# Altium PCB Rigid-QFN-1.PcbDoc (part 2 of 2)
Units mil, origin at the board's own origin, x right, y up, seen from the top; angles counter-clockwise.
Board outline 1000.01 x 1200 mil, 2 copper layers (Top Layer, Bottom Layer), stack 0.552 mil thick; 55 components, 23 nets, 162 pads, 82 vias.
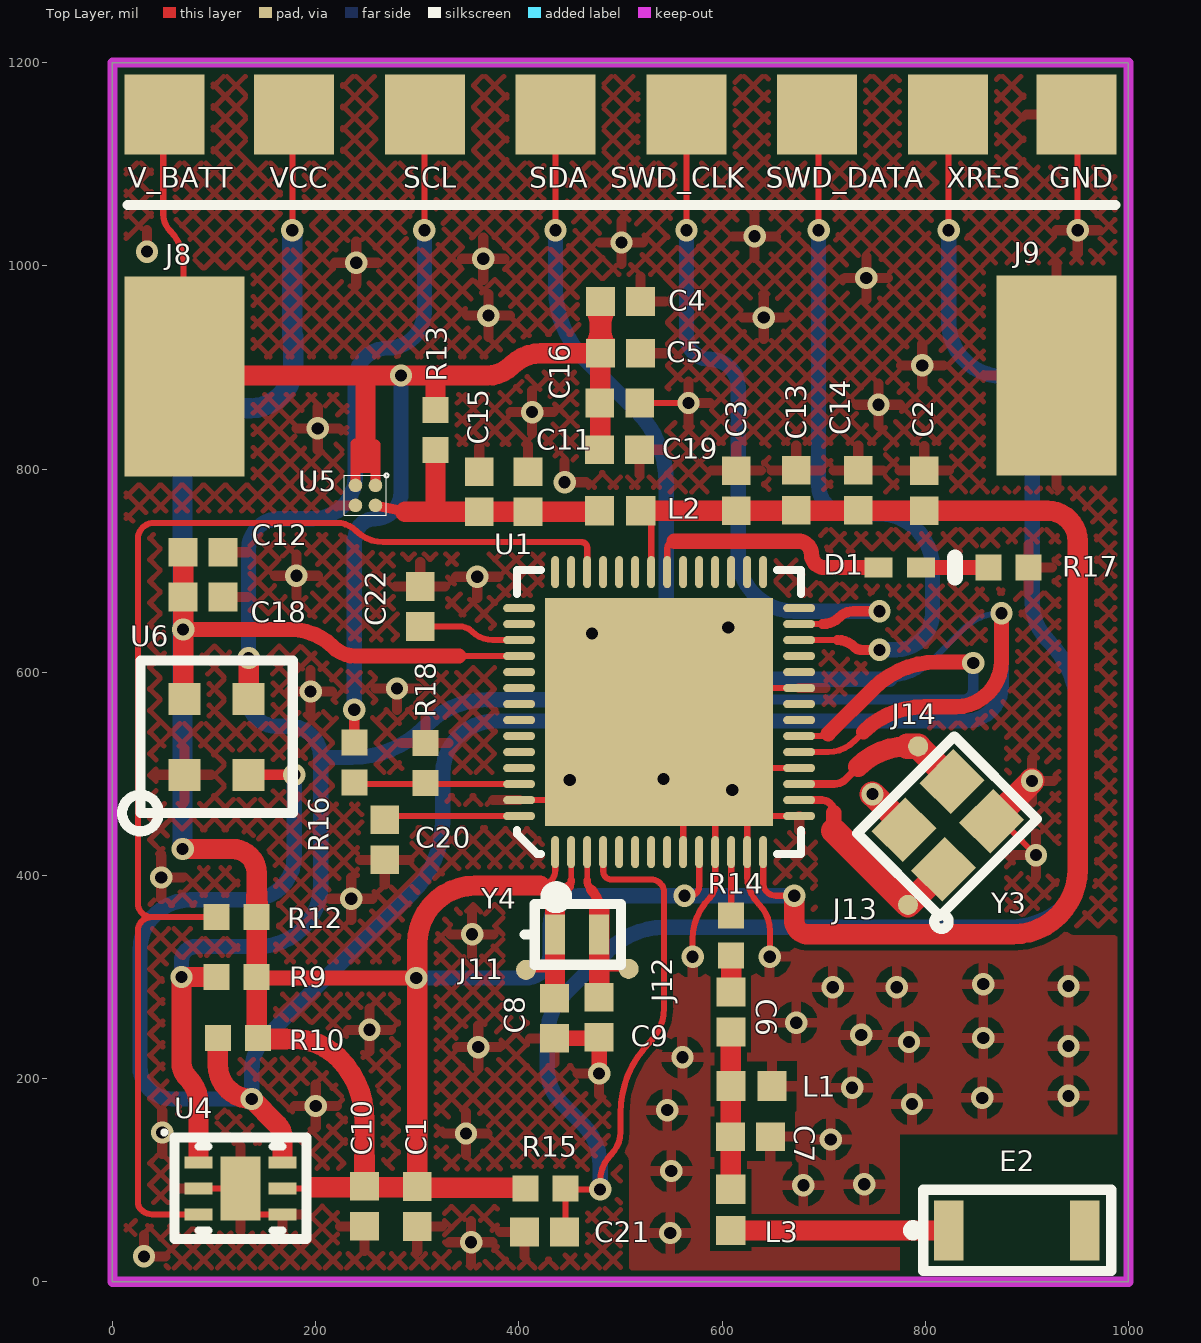
[diagram p0: Top Layer view]

## Other copper (continued)
Top Layer: (continued)
  pour cut-out: 384.74,382 530,382 530,260 383.73,260
Bottom Layer:
  pour cut-out: 1000,0 775,0 775,145 1000,145

## Silkscreen, mask and mechanical layers (free items; w line width, h text height)
Top Overlay:
  lines w10: 15,1060 987,1060
Mechanical 1:
  lines w3.94: 0,1000 0,-0.06 1000,-0.06 1000,1000
  lines w4: 0,1000 1000,1000
Mechanical 3:
  the board outline again, w10